# Altium PCB sedsna.PcbDoc
Units mm, origin at the board's own origin, x right, y up, seen from the top; angles counter-clockwise.
Board outline 152.4 x 101.6 mm, 18 copper layers (F.Cu, F.Mask, B.Cu, B.Mask, F.SilkS, B.SilkS, F.Adhes, B.Adhes, F.Paste, B.Paste, Dwgs.User, Cmts.User, Eco1.User, Eco2.User, Edge.Cuts, Margin, B.CrtYd, F.CrtYd); 1 components, 0 nets, 33 pads, 0 vias.
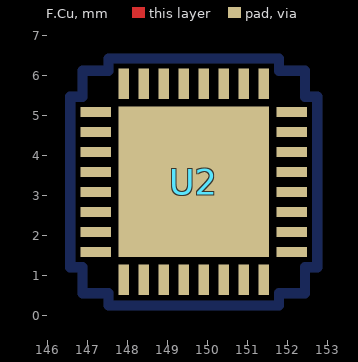
[diagram p0: F.Cu view]
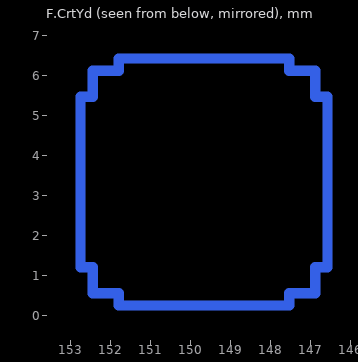
[diagram p1: F.CrtYd view, seen from below]
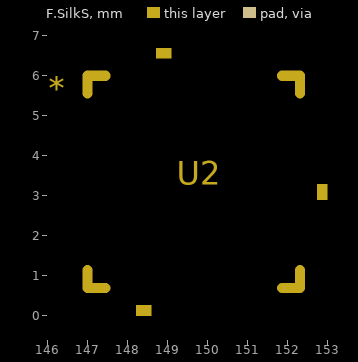
[diagram p2: F.SilkS]
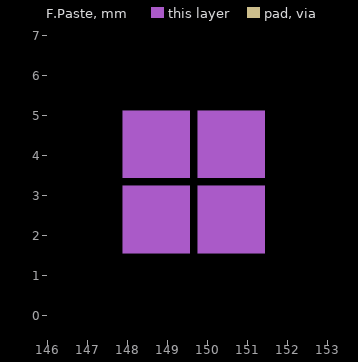
[diagram p3: F.Paste]

## Layer stack, top to bottom
Top Solder: solder mask 0.0102, Solder Resist, Dk 3.5
F.Cu: signal copper 0.0356
Dielectric 1: dielectric 0.32, FR-4, Dk 4.8
F.Mask: signal copper 0.0356
Dielectric2: dielectric 0.32, FR-4, Dk 4.8
B.Cu: signal copper 0.0356
Dielectric3: dielectric 0.32, FR-4, Dk 4.8
B.Mask: signal copper 0.0356
Dielectric4: dielectric 0.32, FR-4, Dk 4.8
F.SilkS: signal copper 0.0356
Dielectric5: dielectric 0.32, FR-4, Dk 4.8
B.SilkS: signal copper 0.0356
Dielectric6: dielectric 0.32, FR-4, Dk 4.8
F.Adhes: signal copper 0.0356
Dielectric7: dielectric 0.32, FR-4, Dk 4.8
B.Adhes: signal copper 0.0356
Dielectric8: dielectric 0.32, FR-4, Dk 4.8
F.Paste: signal copper 0.0356
Dielectric9: dielectric 0.32, FR-4, Dk 4.8
B.Paste: signal copper 0.0356
Dielectric10: dielectric 0.32, FR-4, Dk 4.8
Dwgs.User: signal copper 0.0356
Dielectric11: dielectric 0.32, FR-4, Dk 4.8
Cmts.User: signal copper 0.0356
Dielectric12: dielectric 0.32, FR-4, Dk 4.8
Eco1.User: signal copper 0.0356
Dielectric13: dielectric 0.32, FR-4, Dk 4.8
Eco2.User: signal copper 0.0356
Dielectric14: dielectric 0.32, FR-4, Dk 4.8
Edge.Cuts: signal copper 0.0356
Dielectric15: dielectric 0.32, FR-4, Dk 4.8
Margin: signal copper 0.0356
Dielectric16: dielectric 0.32, FR-4, Dk 4.8
B.CrtYd: signal copper 0.0356
Dielectric17: dielectric 0.32, FR-4, Dk 4.8
F.CrtYd: signal copper 0.0356
Bottom Solder: solder mask 0.0102, Solder Resist, Dk 3.5

## Board outline
25.4,25.4 177.8,25.4 177.8,127 25.4,127

## Design rules (kind name [scope] priority, off if disabled: settings)
Clearance "Clearence 0.2_NetClass" [InNetClass('Default')] p1: gap=0.2 ignorepadtopadclearanceinfootprint=FALSE
MinimumSolderMaskSliver [All] p1: minsoldermaskwidth=0
PolygonConnect [All] p1: connectstyle=Direct reliefconductorwidth=0.254 reliefentries=4 polygonreliefangle="90 Angle" airgapwidth=0.254
RoutingVias [All] p1: holewidth=0.711 width=1.27 viastyle="Through Hole" minholewidth=0.711 minwidth=1.27 maxholewidth=0.711 maxwidth=1.27
SilkToSilkClearance [All] p1: silktosilkclearance=0
SilkToSolderMaskClearance [IsPad] p1: minsilkscreentomaskgap=0 clearancetoexposedcopper=TRUE
SolderMaskExpansion [All] p1: expansion=0 istentingtop=FALSE
Width [All] p1: maxlimit=10 minlimit=0.254 preferedwidth=0.254 toplayer_maxwidth=0.254 midlayer1_maxwidth=0.254 midlayer2_maxwidth=0.254 midlayer3_maxwidth=0.254 midlayer5_prefwidth=0.2 midlayer7_maxwidth=0.254 midlayer9_maxwidth=0.254 midlayer11_maxwidth=0.254 midlayer13_prefwidth=0.2 midlayer15_maxwidth=0.254 midlayer17_maxwidth=0.254 midlayer19_maxwidth=0.254 midlayer21_maxwidth=0.254 midlayer23_maxwidth=0.254 midlayer25_maxwidth=0.254 midlayer27_maxwidth=0.254 midlayer29_maxwidth=0.254 bottomlayer_prefwidth=0.2 minimp=50.000000 maximp=50.000000 favimp=50.000000
27 further rules are at their usual default settings.

## Components (designator, comment, footprint, x,y, rotation, side; value= is the part's Value field where it differs from the comment)
U2 "Comment" QFN32_5X5_EXP 149.662,3.34 r0 top value=ESP32-C3

## Footprints (in the part's own frame and the unit in brackets; to place one, negate y for a bottom-side part, rotate by r counter-clockwise, add the part's x,y. Pads: shape width x height; smd on the part's side, far side on the other; paste and mask are expansions set on the pad)
QFN32_5X5_EXP [mil]
  rect 30x10 smd paste-30 mask-30: 1(-96.5,68.9) 2(-96.5,49.21) 3(-96.5,29.53) 4(-96.5,9.84) 5(-96.5,-9.84) 6(-96.5,-29.53) 7(-96.5,-49.21) 8(-96.5,-68.9) 17(96.5,-68.9) 18(96.5,-49.21) 19(96.5,-29.53) 20(96.5,-9.84) 21(96.5,9.84) 22(96.5,29.53) 23(96.5,49.21) 24(96.5,68.9)
  rect 10x30 smd paste-30 mask-30: 9(-68.9,-96.5) 10(-49.21,-96.5) 11(-29.53,-96.5) 12(-9.84,-96.5) 13(9.84,-96.5) 14(29.53,-96.5) 15(49.21,-96.5) 16(68.9,-96.5) 25(68.9,96.5) 26(49.21,96.5) 27(29.53,96.5) 28(9.84,96.5) 29(-9.84,96.5) 30(-29.53,96.5) 31(-49.21,96.5) 32(-68.9,96.5)
  rect 148x148 smd paste-148 mask-148: 33(0,0)
  F.SilkS region: 131.5,-17.34 121.5,-17.34 121.5,-2.34 131.5,-2.34
  F.SilkS region: -22.03,121.5 -37.03,121.5 -37.03,131.5 -22.03,131.5
  F.SilkS region: -41.71,-131.5 -56.71,-131.5 -56.71,-121.5 -41.71,-121.5
  F.SilkS lines w10: -104.5,-87 -104.5,-104.5 -87,-104.5 ; -104.5,87 -104.5,104.5 -87,104.5 ; 87,-104.5 104.5,-104.5 104.5,-87 ; 87,104.5 104.5,104.5 104.5,87
  F.Paste region: 70.06,-70.06 3.94,-70.06 3.94,-3.94 70.06,-3.94
  F.Paste region: 70.06,3.94 3.94,3.94 3.94,70.06 70.06,70.06
  F.Paste region: -3.94,-70.06 -70.06,-70.06 -70.06,-3.94 -3.94,-3.94
  F.Paste region: -3.94,3.94 -70.06,3.94 -70.06,70.06 -3.94,70.06
  F.CrtYd lines w10: -121.5,-83.9 -121.5,83.9 -109.5,83.9 -109.5,109.5 -83.9,109.5 -83.9,121.5 83.9,121.5 83.9,109.5 109.5,109.5 109.5,83.9 121.5,83.9 121.5,-83.9 109.5,-83.9 109.5,-109.5 83.9,-109.5 83.9,-121.5 -83.9,-121.5 -83.9,-109.5 -109.5,-109.5 -109.5,-83.9 -121.5,-83.9

## Part data
U2: library part QFN32_5X5_EXP, Datasheet=ESP32-C3, ki_fp_filters="QFN32_5X5_EXP QFN32_5X5_EXP-M QFN32_5X5_EXP-L"

## Nets (pads, with @x,y where several pads share a name; then routed paths per layer and width w, separated by ;. In a path a pad name is that pad's centre, name@x,y a point inside that pad or via, vN(x,y) a via of type N, cw(c..) or ccw(c..) an arc to the next point about the centre after c; other vN are vias at no path point)
pads on no net: U2.1 U2.2 U2.3 U2.4 U2.5 U2.6 U2.7 U2.8 U2.9 U2.10 U2.11 U2.12 U2.13 U2.14 U2.15 U2.16 U2.17 U2.18 U2.19 U2.20 U2.21 U2.22 U2.23 U2.24 U2.25 U2.26 U2.27 U2.28 U2.29 U2.30 U2.31 U2.32 U2.33

## Text inside footprints (layer, text, board x,y; h text height)
U2: F.SilkS "*" at 146.039,5.202 h1; F.SilkS "*" at 146.039,5.202 h1; F.Fab "*" at 147.436,5.202 h1; F.Fab "*" at 147.436,5.202 h1